# Altium PCB POWERSP_PCB.PcbDoc
Units mil, origin at the board's own origin, x right, y up, seen from the top; angles counter-clockwise.
Board outline 6000 x 4000 mil, 2 copper layers (Top Layer, Bottom Layer); 16 components, 6 nets, 43 pads, 0 vias.
Unrouted connection lines stored in the file: 1.
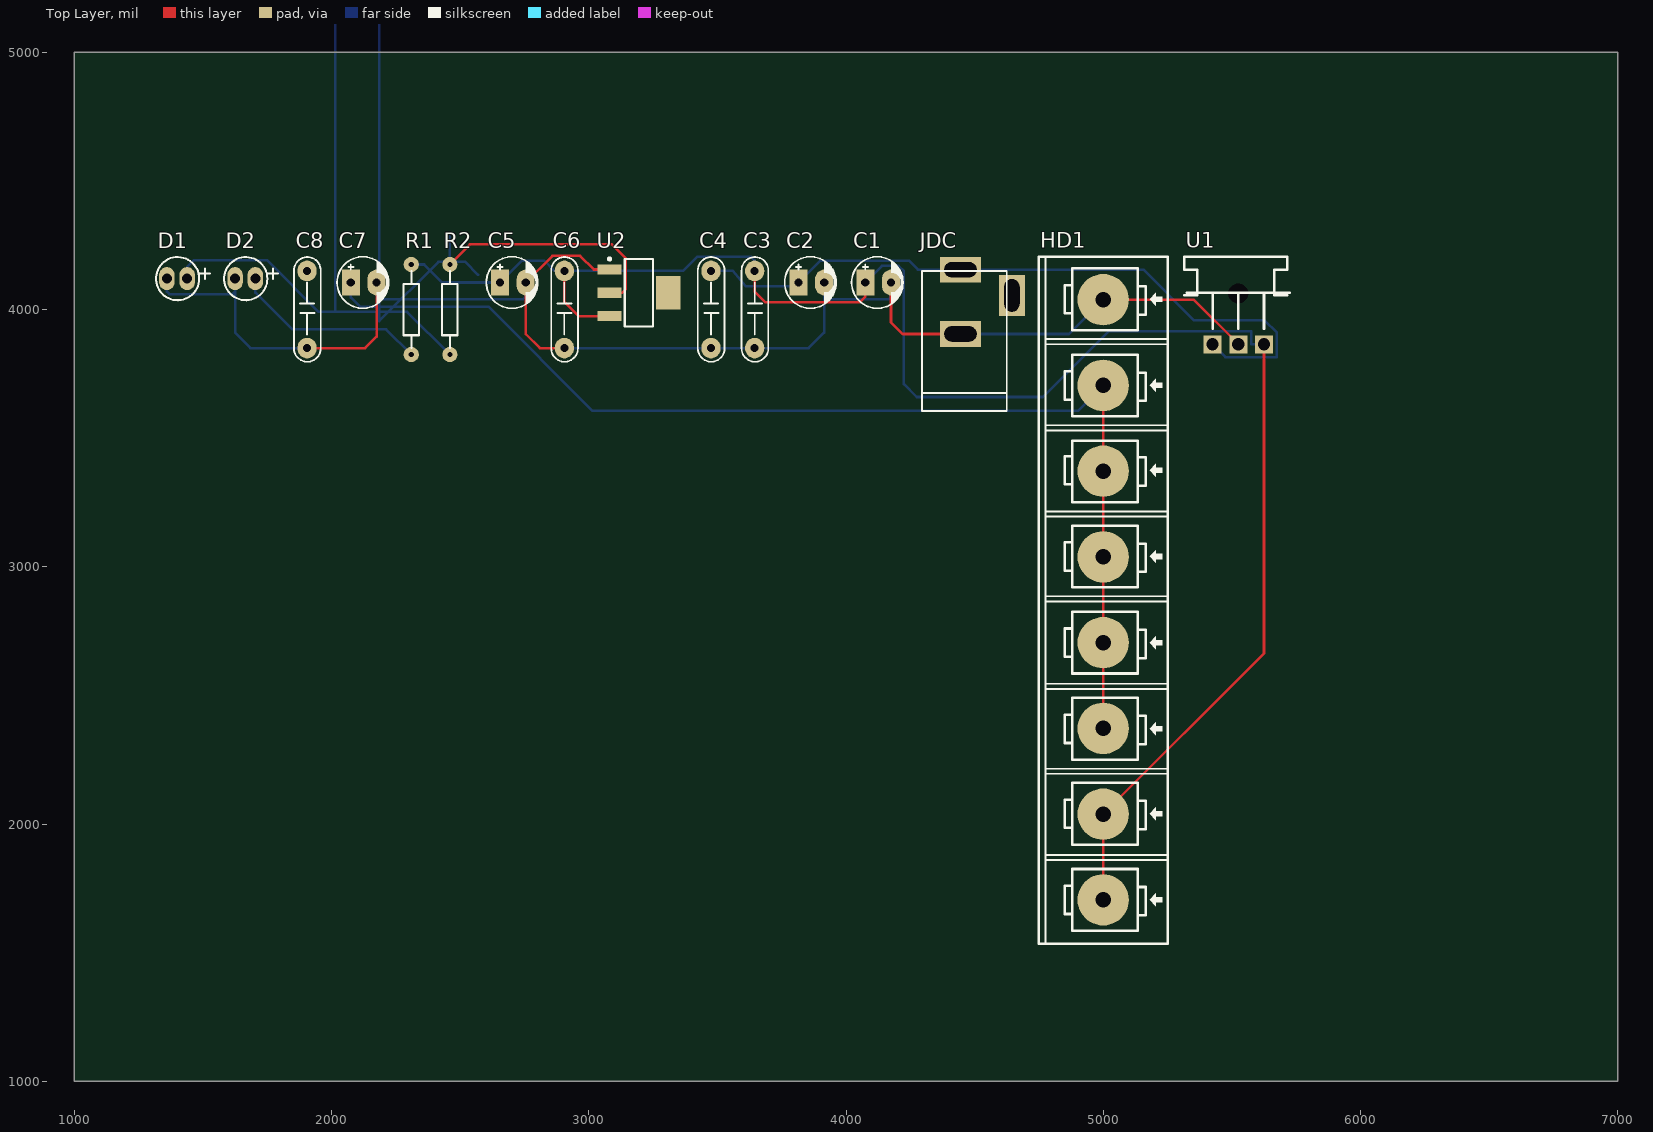
[diagram p0: Top Layer view]
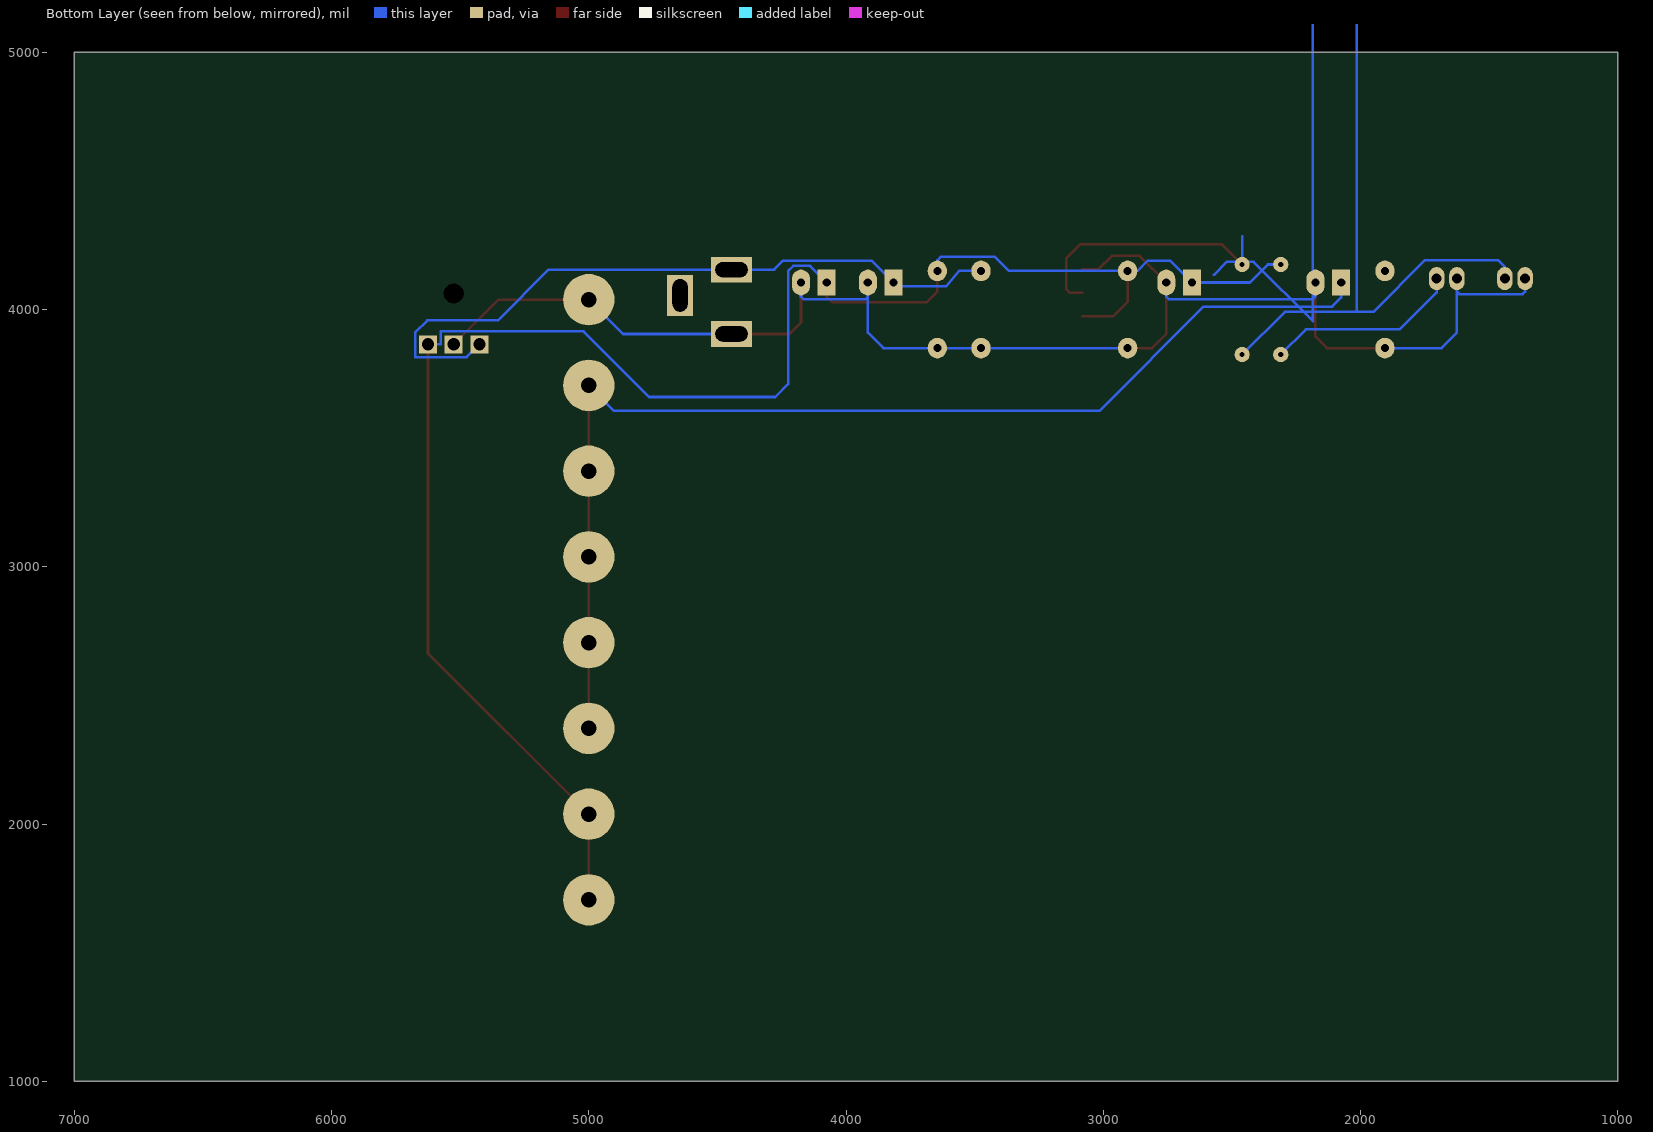
[diagram p1: Bottom Layer view, seen from below]
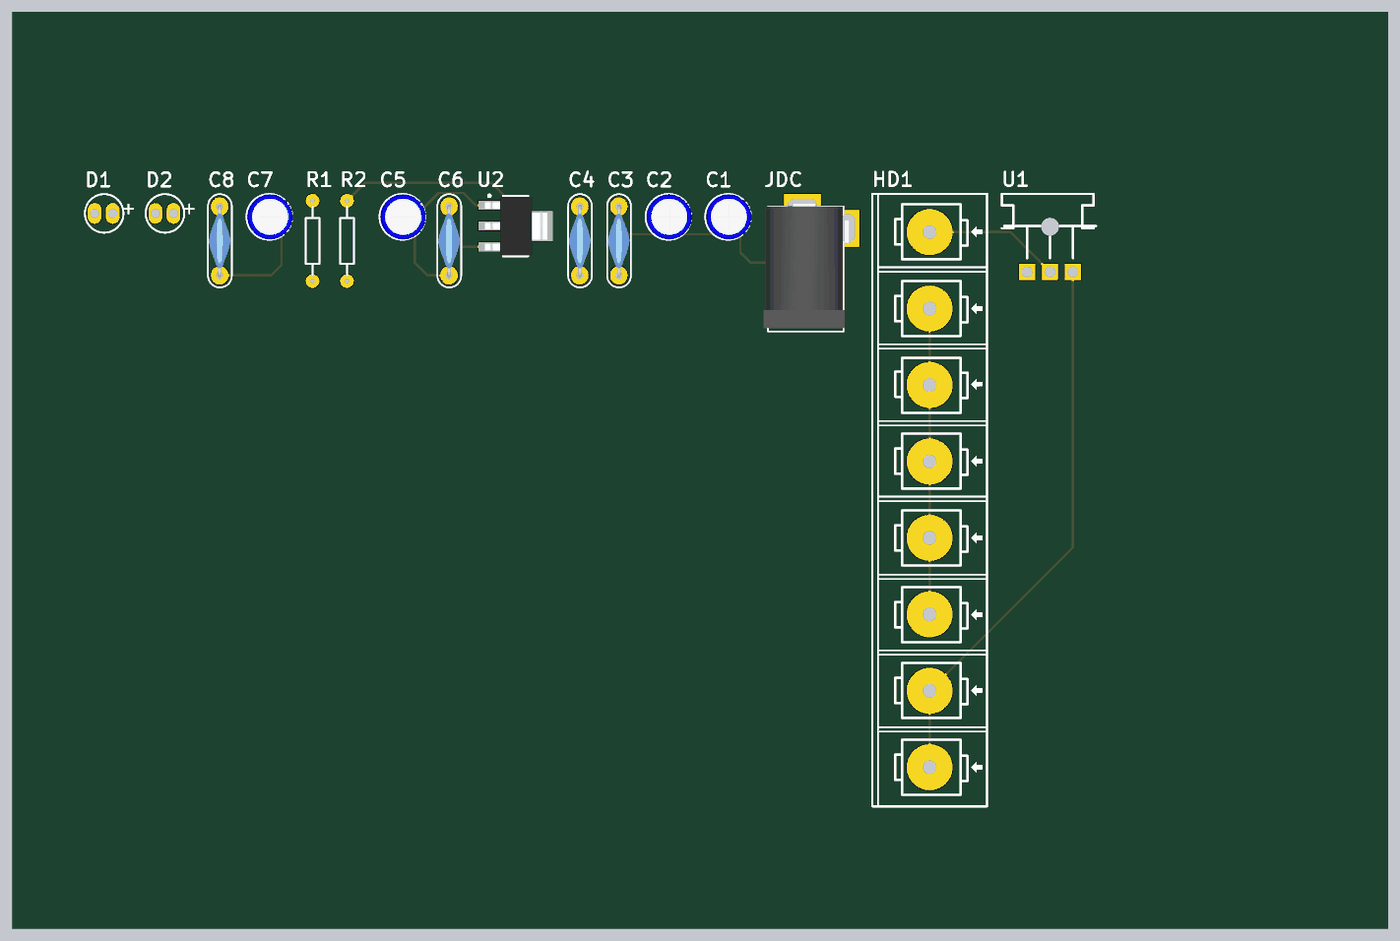
[diagram p2: 3D render of the assembled board from above, using the file's embedded part models]

## Layer stack, top to bottom
Top Solder: solder mask 0.4, Solder Resist, Dk 3.5
Top Layer: signal copper 1.4
Dielectric 1: dielectric 12.6, FR-4, Dk 4.8
Bottom Layer: signal copper 1.4
Bottom Solder: solder mask 0.4, Solder Resist, Dk 3.5

## Board outline
1000,1000 7000,1000 7000,5000 1000,5000

## Design rules (kind name [scope] priority, off if disabled: settings)
Clearance [All] p1: gap=10 ignorepadtopadclearanceinfootprint=FALSE except(0: Arc-Hole Track-Hole SMDPad-Hole THPad-Hole Via-Hole Fill-Hole Poly-Hole Region-Hole Text-Hole)
PolygonConnect [All] p1: connectstyle=Relief reliefconductorwidth=10 reliefentries=4 polygonreliefangle="90 Angle" airgapwidth=10
RoomDefinition POWERSP_SCH [InComponentClass('POWERSP_SCH')] p1: confinementstyle=ConfineIn formatcopy=TRUE lockcomponents=FALSE outline 1305,1525 5735,1525 5735,4315 1305,4315
RoutingVias [All] p1: holewidth=28 width=50 viastyle="Through Hole" minholewidth=28 minwidth=50 maxholewidth=28 maxwidth=50
SolderMaskExpansion [All] p1: expansion=4 istentingtop=FALSE
Width [All] p1: maxlimit=10 minlimit=10 preferedwidth=10
30 further rules are at their usual default settings.

## Components (designator, comment, footprint, x,y, rotation, side; value= is the part's Value field where it differs from the comment)
C1 "47uF" CP1/2 4075,4105 r0 top value=10uF/50V
C2 "47uF" CP1/2 3815,4105 r0 top value=10uF/50V
C3 "0.1uF" CN3 3645,3850 r90 top
C4 "0.1uF" CN3 3475,3850 r90 top
C5 "47uF" CP1/2 2655,4105 r0 top value=10uF/50V
C6 "0.1uF" CN3 2905,3850 r90 top
C7 "47uF" CP1/2 2075,4105 r0 top value=10uF/50V
C8 "0.1uF" CN3 1905,3850 r90 top
D1 "LED" CAP10UF 1360,4120 r0 top
D2 "LED" CAP10UF 1625,4120 r0 top
HD1 "Header 8" HED8V 5000,1705 r90 top
JDC "Jac DC" DC-IN 4545,4030 r90 top
R1 "220" R1/6W 2310,4000 r90 top value="R1/4W - 1K"
R2 "220" R1/6W 2460,4000 r90 top value="R1/4W - 1K"
U1 "LM7805" TO-220 5425,3865 r0 top
U2 "LM1117-3.3V" SOT223-4N 3195,4065 r0 top

## Footprints (in the part's own frame and the unit in brackets; to place one, negate y for a bottom-side part, rotate by r counter-clockwise, add the part's x,y. Pads: shape width x height; smd on the part's side, far side on the other; paste and mask are expansions set on the pad)
CAP10UF [mil]
  oval 60x90 hole 39.37 unplated: 1(78.74,0) 2(0,0)
  silkscreen extent -42,-84 167,84
CN3 [mil] "Cap np W 0.3"
  oval 80x75 hole 31: 1(0,0) 2(300,0)
  silkscreen extent -53,-53 354,51, body extent -7,-47 308,47, height 419
CP1/2 [mil] "Tu hoa < 22uF/16>50V"
  rect 70x100 hole 32: 1(0,0)
  oval 70x100 hole 32: 2(100,0)
  silkscreen extent -53,-100 147,100, body extent -49,-99 149,99, height 287
DC-IN [mil] "Jac DC input"
  rect 100x160 hole 59.06 slot 125.98 at 90 deg: 1(125,100) 2(-125,100)
  rect 160x100 hole 59.06 slot 125.98 at 0 deg: 3(25,-100)
  silkscreen extent -425,-80 120,250, body extent -410,-105 134,269, height 434
HED8V [mil] "Header 6"
  round 200 hole 60: 1(0,0) 2(333.33,0) 3(666.67,0) 4(1000,0) 5(1333.33,0) 6(1666.67,0) 7(2000,0) 8(2333.33,0)
  silkscreen extent -170,-250 2500,250
R1/6W [mm]
  round 1.5 hole 0.5: 1(-4.445,0) 2(4.445,0)
  silkscreen extent -3.81,-0.76 3.81,0.76
SOT223-4N [mm] "SOT223, 4-Leads, Body 6.5x3.5mm, Pitch 2.3mm, Lead Span 7mm, IPC Medium Density"
  rect 2.4x1 smd: 1(-2.9,2.3) 2(-2.9,0) 3(-2.9,-2.3)
  rect 2.4x3.3 smd: 4(2.9,0)
  silkscreen extent -3.02,-3.35 1.4,3.47, body extent -3.39,-3.27 3.5,3.23, height 1.72
TO-220 [mil]
  round 70 hole 78.74 unplated: 0(100,196.85)
  rect 70x70 hole 47.24 unplated: 1(0,0) 2(100,0) 3(200,0)
  silkscreen extent -110,60 300,340

## Part data
C1 C2 C5 C7: library part CP1, "Cap P  0,1uF < 22uF , 16 - 50V", Description 1="10 => 220uF/6,3V/10V - 10uF => 100uF/16V", Description 2="0,1uF => 33uF/50V - 10uF => 22uF/63V", Description 3="0,47uF => 10uF/100V"
C3 C4 C6 C8: library part "CAP 102 2KV", "Capacitor (Semiconductor SIM Model)", LatestRevisionDate=17-Jul-2002, LatestRevisionNote="Re-released for DXP Platform.", PackageReference=C1206, Published=8-Jun-2000, Publisher="Altium Limited"
HD1: "Header 8 Vit Broad"
JDC: library part DCIN, "Jac DC input"
R1 R2: library part Res, "Resistor 1/4W"
U1: "TO-220", Text Field1=70, Text Field2=30
U2: library part LM1117, "800mA Low-Dropout Linear Regulator", Creator="Nguyen Ba Bien", Website=http://group3i.net

## Nets (pads, with @x,y where several pads share a name; then routed paths per layer and width w, separated by ;. In a path a pad name is that pad's centre, name@x,y a point inside that pad or via, vN(x,y) a via of type N, cw(c..) or ccw(c..) an arc to the next point about the centre after c; other vN are vias at no path point)
3.3V: C7.1 C8.2 HD1.3 HD1.4 HD1.5 HD1.6 HD1.7 R2.2 U2.2 | length 24255.6
  Top Layer w10: R2.2 2538,4253 3090,4253 3144,4199 3144,4079 3130,4065 U2.2 ; HD1.3 HD1.4 HD1.5 HD1.6 HD1.7
  Bottom Layer w10: 2015,4000 2015,12960 2065,13010 2135,13010 2185,12960 2185,3955 2415,4185 2520,4185 2570,4135 ; C7.1 2075,4046 2110,4011 2610,4011 3015,3606 4901,3606 HD1.7 ; R2.2 2460,4285
5V: C1.1 C3.2 C5.1 C6.2 HD1.1 HD1.2 R1.2 U1.3 U2.3 | length 7016.1
  Top Layer w10: C6.2 2905,4030 2960.55,3974.45 U2.3 ; C3.2 3645,4070 3686,4029 4054,4029 4075,4050 C1.1 ; HD1.1 HD1.2 5625,2663.33 U1.3
  Bottom Layer w10: R1.2 2360,4175 2430,4105 C5.1 2740,4190 2827,4190 2867,4150 C6.2 3367,4150 3423,4206 3630,4206 3645,4191 C3.2 ; C1.1 4140,4170 4205,4170 4225,4150 4225,3710 4275,3660 4765,3660 5020,3915 5575,3915 5575,3865 U1.3
9V: C2.1 C4.2 JDC.1 U1.1 | length 2758.2
  Bottom Layer w10: C4.2 3560,4150 3610,4091 3815,4091 C2.1 3900,4190 4245,4190 4280,4155 JDC.1 5156,4155 5353,3958 5627,3958 5675,3910 5675,3815 5475,3815 U1.1
GND: C1.2 C2.2 C3.1 C4.1 C5.2 C6.1 C7.2 C8.1 D1.2 D2.2 HD1.8 JDC.2 U1.2 U2.1 | length 6002.7
  Top Layer w10: C8.1 2130,3850 2175,3895 C7.2 ; C6.1 2810,3850 2755,3905 C5.2 2859,4209 2966,4209 3019.45,4155.55 U2.1 ; C1.2 4175,3950 4220,3905 JDC.2 ; HD1.8 5351.67,4038.33 U1.2
  Bottom Layer w10: D1.2 1360,4070 1370,4060 1615,4060 1625,4070 ; D2.2 1625,4070 ; C8.1 1685,3850 1625,3910 1625,4070 ; C7.2 2175,4050 2185,4040 2745,4040 2755,4050 C5.2 ; C6.1 C4.1 C3.1 3855,3850 3915,3910 3915,4050 ; C2.2 3915,4050 ; C1.2 4175,4050 4165,4040 3925,4040 3915,4050 ; JDC.2 4866.67,3905 HD1.8
NetD1_1: D1.1 R2.1 | length 1230
  Bottom Layer w10: D1.1 1438.74,4166 1464.74,4192 1749,4192 1950,3991 2294,3991 R2.1
NetD2_1: D2.1 R1.1 | length 759.9
  Bottom Layer w10: D2.1 1703.74,4066.26 1847.47,3922.53 2212.47,3922.53 R1.1
pads on no net: JDC.3 U1.0 U2.4